# Altium PCB PCB2.PcbDoc
Units mil, origin at the board's own origin, x right, y up, seen from the top; angles counter-clockwise.
Board outline 1896.5 x 1505 mil, 4 copper layers (Top Layer, GND_Layer, PWR_Layer, Bottom Layer), stack 61.2 mil thick; 58 components, 40 nets, 238 pads, 93 vias.
Unrouted connection lines stored in the file: 76.
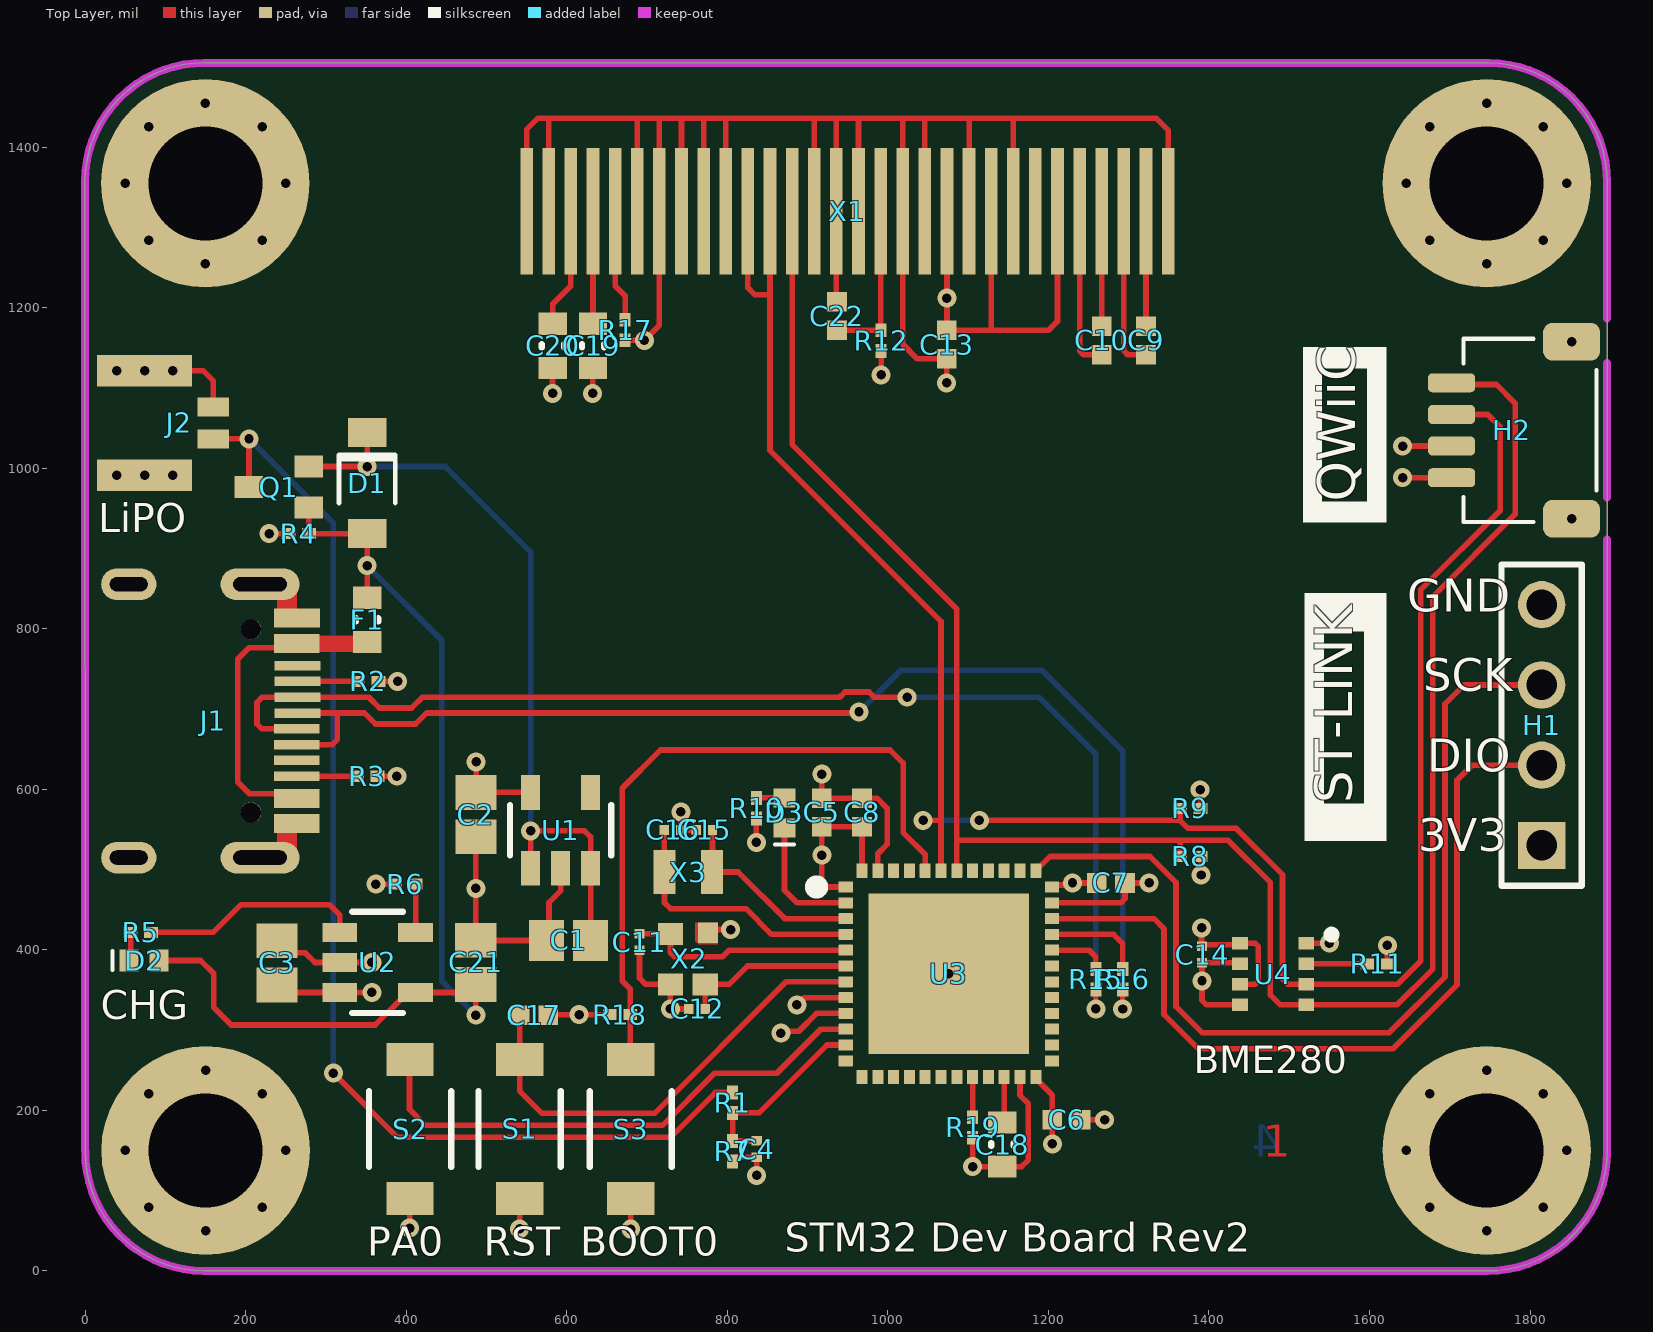
[diagram p0: Top Layer view]
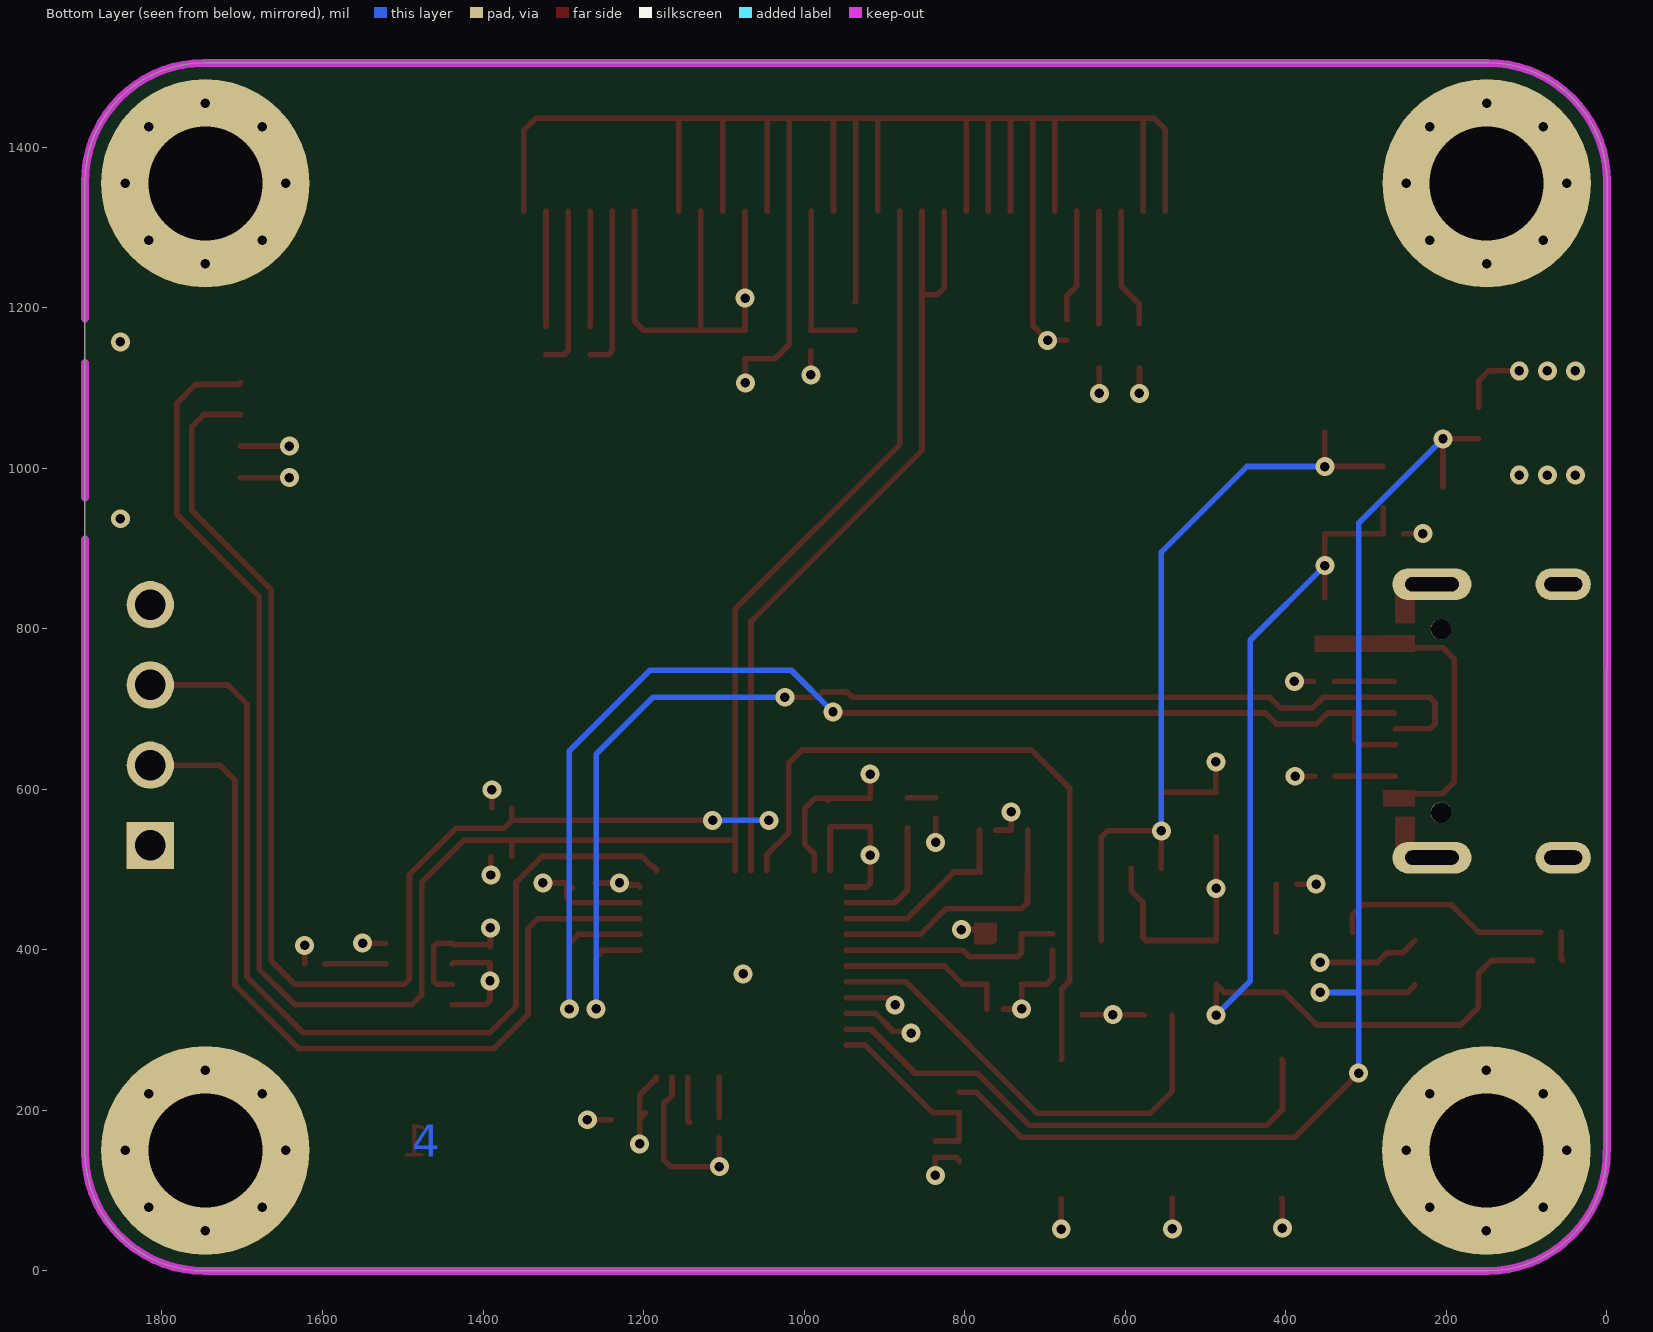
[diagram p1: Bottom Layer view, seen from below]
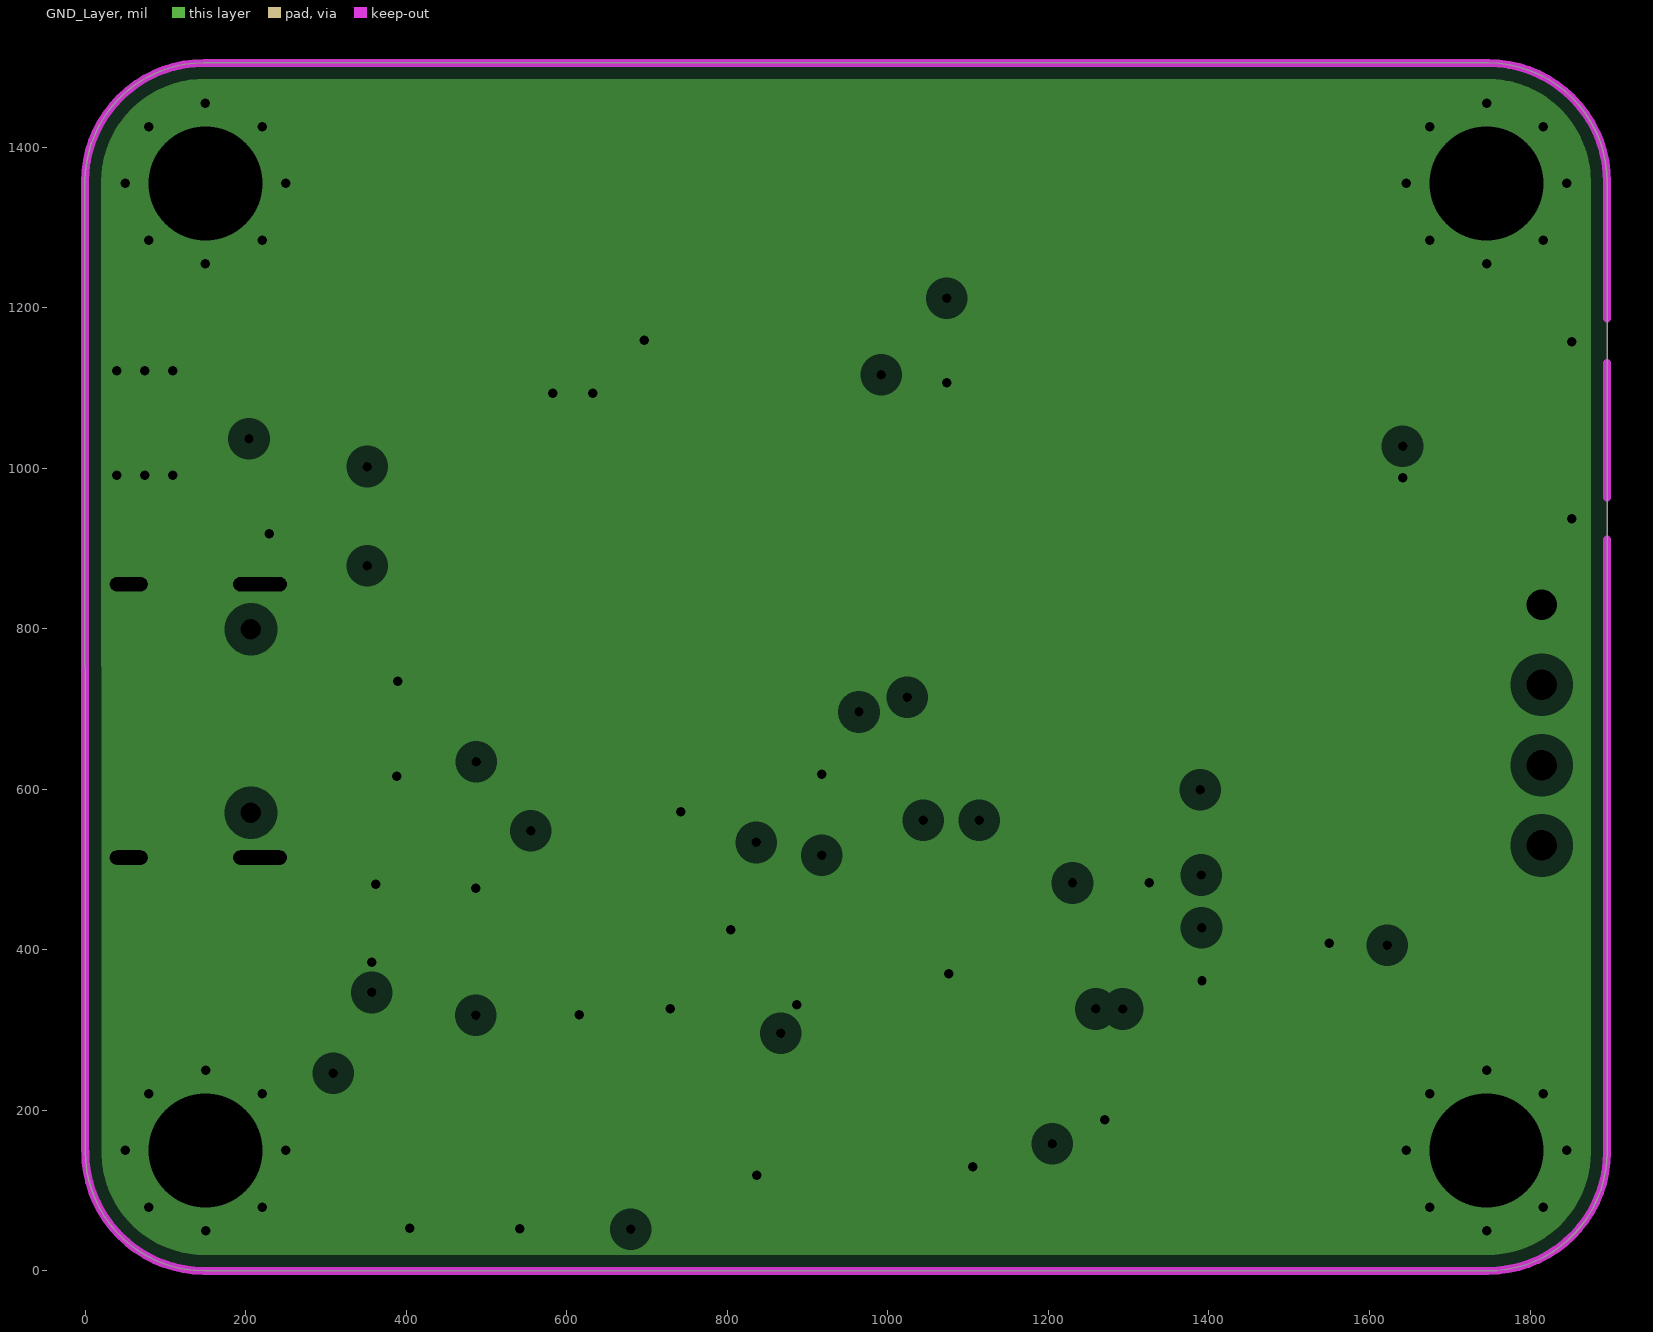
[diagram p2: GND_Layer, clearances drawn from the general rule]
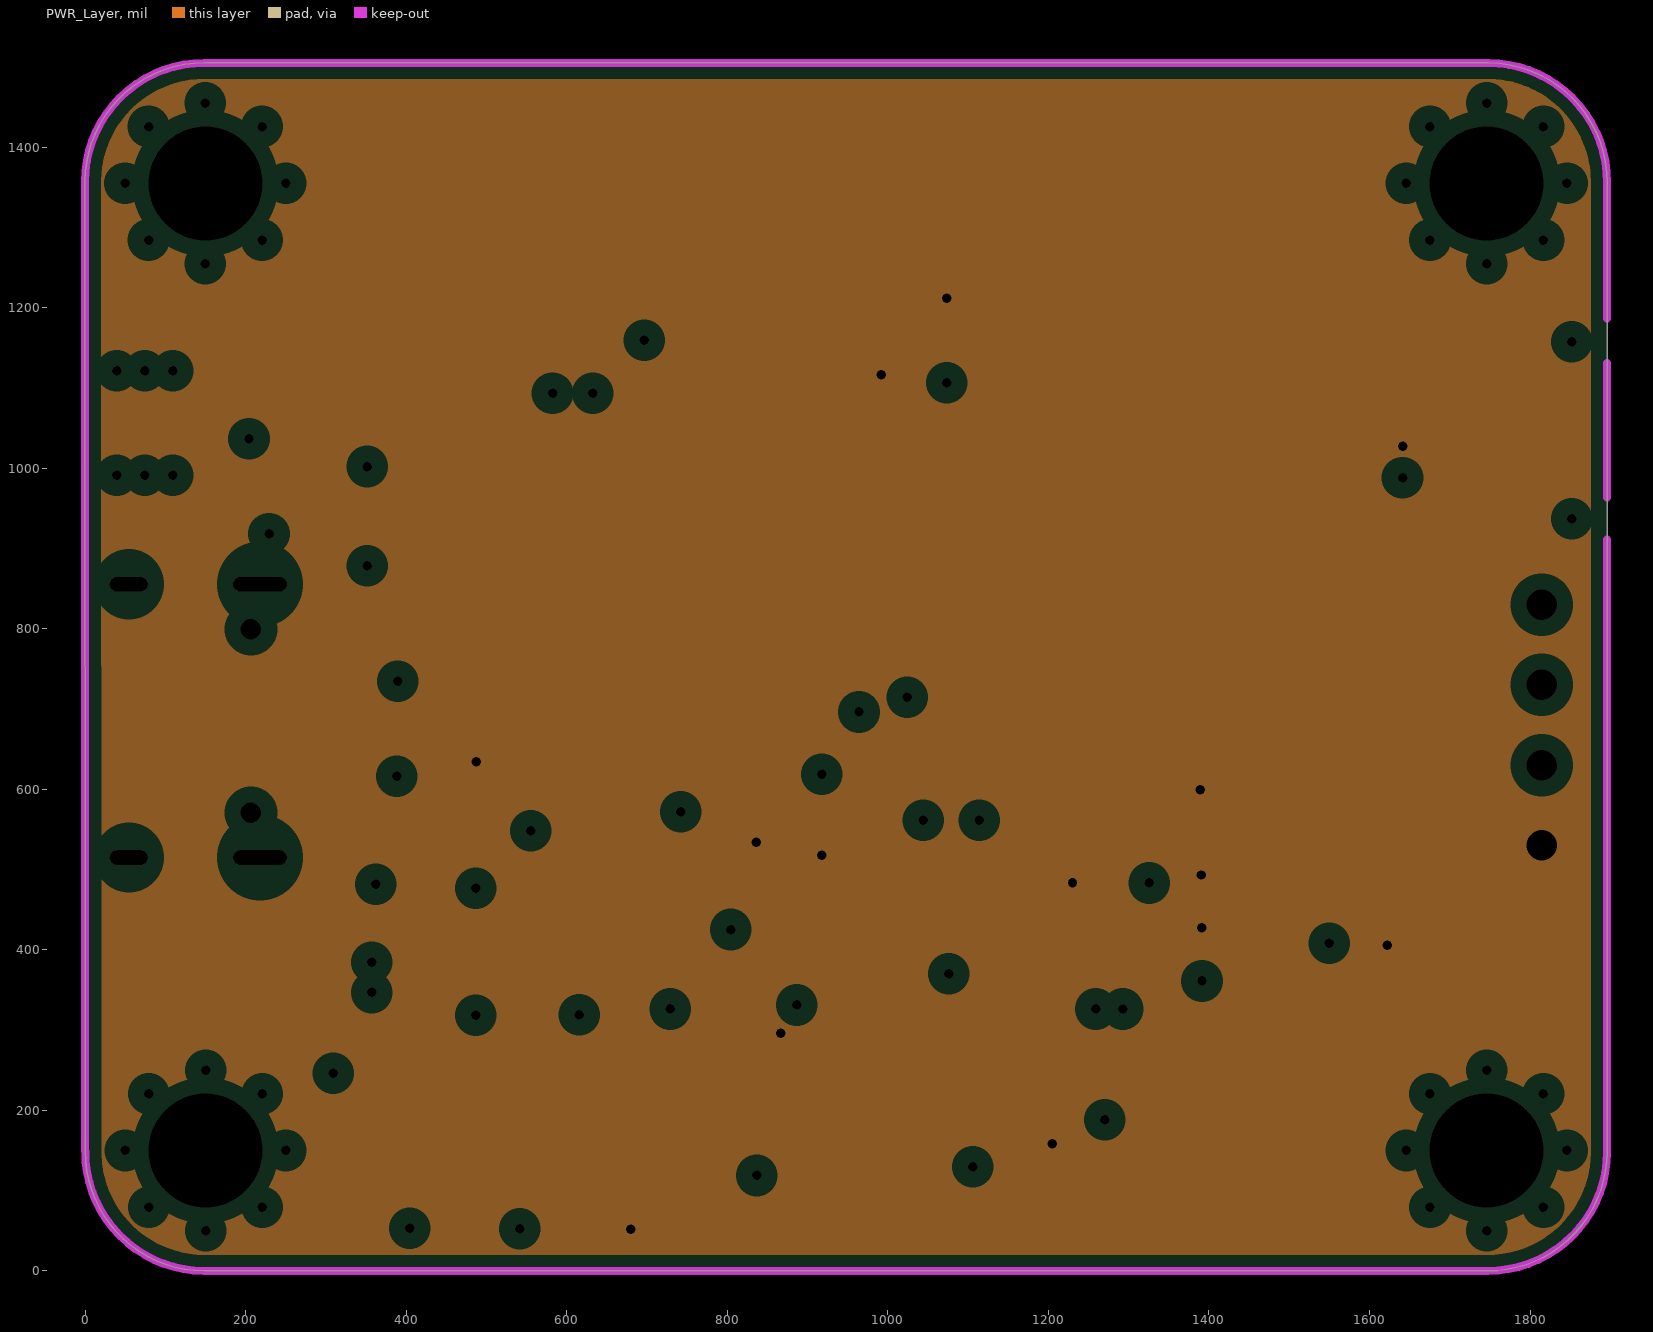
[diagram p3: PWR_Layer, clearances drawn from the general rule]
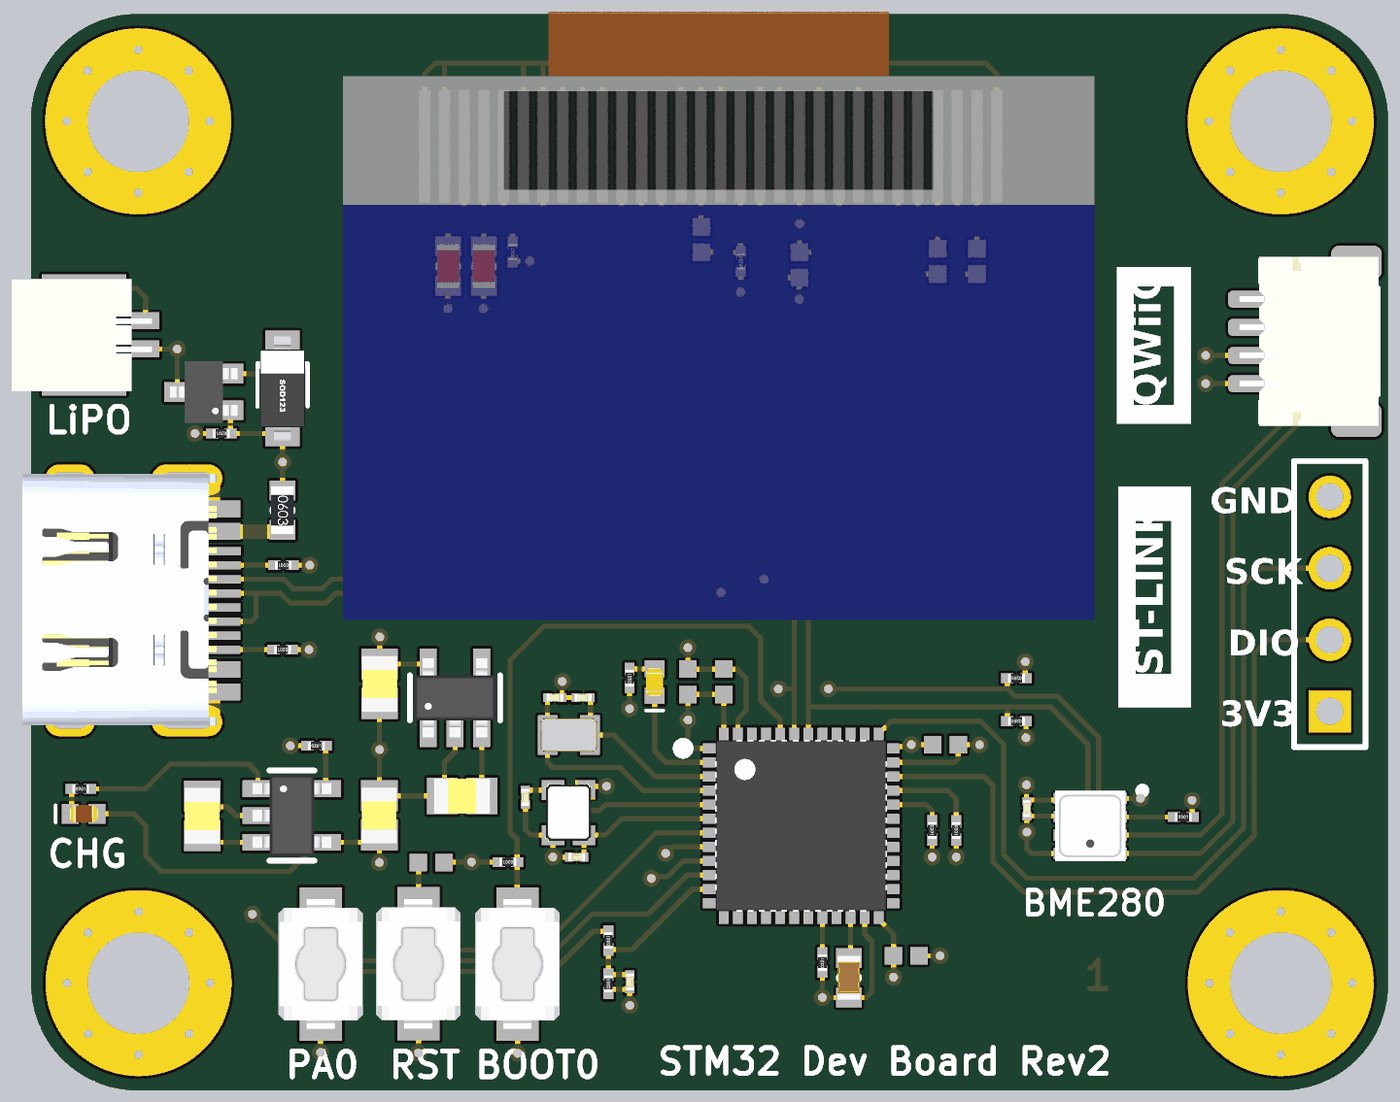
[diagram p4: 3D render of the assembled board from above, using the file's embedded part models]

## Layer stack, top to bottom
Top Solder: solder mask 0.4, Solder Resist, Dk 3.5
Top Layer: signal copper 1.4
Dielectric 2: prepreg 2.8, PP-006, Dk 4.1
GND_Layer: plane copper 1.2, net GND
Dielectric 1: dielectric 50.4, FR-4, Dk 4.8
PWR_Layer: plane copper 1.2, net +3.3V
Dielectric 3: prepreg 2.8, PP-006, Dk 4.1
Bottom Layer: signal copper 1.4
Bottom Solder: solder mask 0.4, Solder Resist, Dk 3.5

## Board outline
0,149 ccw(c148.5,148.5) 148,0 1747,0 ccw(c1747.5,148.5) 1896,148 1895.96,147.5 1895.96,1356 1896,1356 ccw(c1747.5,1356.5) 1748,1505 149,1505 148.5,1505 ccw(c148,1356.5) -0.5,1357

## Design rules (kind name [scope] priority, off if disabled: settings)
Clearance Clearance_J1 [All vs InComponent('J1')] p1: gap=5 ignorepadtopadclearanceinfootprint=FALSE
Clearance Clearance_U3 [All vs InComponent('U3')] p2: gap=5 ignorepadtopadclearanceinfootprint=FALSE
Clearance [All] p3: gap=8 ignorepadtopadclearanceinfootprint=FALSE
HoleSize [All] p1: absolutevalues=TRUE maxlimit=300 minlimit=1 maxpercent=80.000 minpercent=20.000
MinimumSolderMaskSliver [All] p1: minsoldermaskwidth=0.1
PlaneClearance [All] p1: clearance=20
PlaneConnect PlaneConnect_VIA [(IsVia)] p1: planeconnectstyle=Direct reliefexpansion=20 reliefentries=4 reliefconductorwidth=10 reliefairgap=10
PlaneConnect [All] p2: planeconnectstyle=Relief reliefexpansion=20 reliefentries=4 reliefconductorwidth=10 reliefairgap=10
PolygonConnect [All] p1: connectstyle=Relief reliefconductorwidth=10 reliefentries=4 polygonreliefangle="90 Angle" airgapwidth=10
RoutingVias [All] p1: holewidth=11.81 width=23.62 viastyle="Through Hole" minholewidth=11.81 minwidth=23.62 maxholewidth=11.81 maxwidth=23.62
SilkToSilkClearance [All] p1: silktosilkclearance=2
SilkToSolderMaskClearance [IsPad] p1: minsilkscreentomaskgap=1 clearancetoexposedcopper=TRUE
SolderMaskExpansion [All] p1: expansion=4 istentingtop=FALSE
Width [All] p1: maxlimit=25 minlimit=7 preferedwidth=7
24 further rules are at their usual default settings.

## Components (designator, comment, footprint, x,y, rotation, side; value= is the part's Value field where it differs from the comment)
C1 "10uF" CAPC2012X140N 602.03,411.66 r180 top
C2 "10uF" CAPC2012X140N 486.69,568.42 r270 top
C3 "10uF" CAPC2012X140N 238.96,383.87 r90 top
C4 "0.1uF" CAPC0603X56N 836.52,151.62 r270 top
C5 "0.1uF" CAPC1005X56N 917.69,571.26 r270 top
C6 "0.1uF" CAPC1005X56N 1222.65,188.27 r180 top
C7 "0.1uF" CAPC1005X56N 1277.65,483.27 r180 top
C8 "0.1uF" CAPC1005X56N 967.69,571.26 r270 top
C9 "1uF" CAPC1005X56N 1321.52,1159.14 r90 top
C10 "1uF" CAPC1005X56N 1266.52,1159.14 r90 top
C11 "10pF" CAPC0603X56N 690.42,409.69 r270 top
C12 "10pF" CAPC0603X56N 762.28,326.27 r180 top
C13 "1uF" CAPC1005X56N 1073.52,1154.14 r90 top
C14 "0.1uF" CAPC0603X56N 1391.29,393.93 r270 top
C15 "10pF" CAPC0603X56N 771.19,549.31 r180 top
C16 "10pF" CAPC0603X56N 731.72,549.31 r0 top
C17 "1uF" CAPC1005X56N 558.83,318.54 r180 top
C18 "2.2uF" CAPC1608X09L 1142.57,157.44 r270 top
C19 "4.7uF" CAPC1608X09L 632.57,1152.44 r90 top
C20 "2.2uF" CAPC1608X09L 582.57,1152.44 r270 top
C21 "10uF" CAPC2012X140N 486.52,384.42 r90 top
C22 "0.1uF" CAPC1005X56N 936.52,1189.57 r90 top
D1 "MBR0520-TP" SOD123 351.11,981.54 r270 top value=MBR0520
D2 "Red Led" LED1005X40N-Red 73.33,386.66 r0 top
D3 "=Value" LED1005X40N-Orange 871.11,570.63 r90 top
F1 "PTC" "RESC1608X06L (0603 FOOTPRINT)" 351.11,811.1 r270 top
H1 "CON4" HDR1X4-Empty 1814.5,680 r90 top locked
H2 "QWiiC" SM04B-SRSS-TB 1776.96,1047.31 r90 top
J1 "USB-C" TYPE-C-31-M-12 62.06,514.88 r270 top locked
J2 "CON2" JST_Micro_2PIN 159.59,1056.35 r270 top
Q1 "LP1480WT1G" SC-70 241.11,976.54 r180 top
R1 "1M" "RESC0603X40L (0201 footprint)" 806.52,209.65 r90 top
R2 "5.1K" "RESC0603X40L (0201 footprint)" 352.3,734.37 r180 top
R3 "5.1K" "RESC0603X40L (0201 footprint)" 351.31,616.26 r180 top
R4 "100K" "RESC0603X40L (0201 footprint)" 265.72,918.54 r180 top
R5 "4.7K" "RESC0603X40L (0201 footprint)" 69.23,421.66 r0 top
R6 "4K" "RESC0603X40L (0201 footprint)" 398.72,481.86 r0 top
R7 "1M" "RESC0603X40L (0201 footprint)" 806.52,149.06 r90 top
R8 "4.7K" "RESC0603X40L (0201 footprint)" 1376.75,516.31 r180 top
R9 "4.7K" "RESC0603X40L (0201 footprint)" 1376.75,576.31 r180 top
R10 "4.7K" "RESC0603X40L (0201 footprint)" 836.11,576.54 r90 top
R11 "10K" "RESC0603X40L (0201 footprint)" 1609.91,382.34 r0 top
R12 "10K" "RESC0603X40L (0201 footprint)" 991.52,1159.06 r90 top
R15 "10" "RESC0603X40L (0201 footprint)" 1258.96,363.51 r270 top
R16 "10" "RESC0603X40L (0201 footprint)" 1292.52,363.47 r270 top
R17 "390K" "RESC0603X40L (0201 footprint)" 672.57,1172.2 r90 top
R18 "10K" "RESC0603X40L (0201 footprint)" 666.16,319.31 r180 top
R19 "10K" "RESC0603X40L (0201 footprint)" 1105.48,178.66 r90 top
S1 "=Value" TS-1088R-02526 541.11,176.93 r270 top
S2 "=Value" TS-1088R-02526 404.59,176.66 r270 top
S3 "=Value" TS-1088R-02526 679.59,176.66 r90 top
U1 "HT7833" SOT95P280X144-5N 592.19,548.91 r90 top
U2 "MCP73831T-2ACI/OT" SOT95P280X144-5N 364.27,384.26 r0 top value=MCP73831T-2ACI
U3 "STM32F401CCU6" "QFN48_NEWEST 0.5mm pitch" 1075.96,370 r0 top
U4 "BME280" LGA2.5X2.5-8N 1479.78,369.72 r0 top
X1 "OLED_0.96 inch" "OLED_GLASS 0.96 INCH_TOPSIDE" 949.5,1320 r0 top locked
X2 "25 Mhz" OSC20X16 752.39,389.11 r270 top
X3 "32Khz" TJXM32768K2TGDCNT2T 751.11,496.93 r180 top

## Footprints (in the part's own frame and the unit in brackets; to place one, negate y for a bottom-side part, rotate by r counter-clockwise, add the part's x,y. Pads: shape width x height; smd on the part's side, far side on the other; paste and mask are expansions set on the pad)
CAPC0603X56N [mm] "Chip Capacitor, 2-Leads, Body 0.61x0.3mm, IPC Medium Density (0201 ceramic)"
  rect 0.3x0.32 smd: 1(-0.26,0) 2(0.26,0)
  body extent -0.3,-0.15 0.3,0.15, height 0.3
CAPC1005X56N [mm] "Chip Capacitor, 2-Leads, Body 1.0x0.5mm, IPC Medium Density (0402 ceramic)"
  rect 0.62x0.62 smd: 1(-0.45,0) 2(0.45,0)
  body extent -0.55,-0.3 0.55,0.3, height 0.6
CAPC1608X09L [mm] "Chip Capacitor, 2-Leads, Body 1.6x0.8mm, IPC High Density (0603 dense)"
  rect 0.7x0.9 smd: 1(-0.7,0) 2(0.7,0)
  silkscreen extent -0.05,-0.35 0.05,0.35, body extent -0.89,-0.48 0.88,0.48, height 1.03
CAPC2012X140N [mm] "Chip Capacitor, 2-Leads, Body 2.0x1.3mm, IPC Medium Density (0805 ceramic)"
  rect 1.1x1.3 smd: 1(-0.7,0) 2(0.7,0)
  body extent -1,-0.62 1,0.63, height 1.24
HDR1X4-Empty [mm]
  rect 1.5x1.5 hole 0.965: 1(-3.81,0)
  round 1.5 hole 0.965: 2(-1.27,0) 3(1.27,0) 4(3.81,0)
  silkscreen extent -5.08,-1.27 5.08,1.27
JST_Micro_2PIN [mm]
  rect 0.6x1 smd: 1(0.5,0) 2(-0.5,0)
  rect 1x3 smd: ""(-1.65,-2.175) ""(1.65,-2.175)
  body extent -1.99,-4.74 2,0.24, height 2.9
LED1005X40N-Orange [mm] "Chip LED 2-Leads, Body 1.0x0.5mm, (0402)"
  rect 0.6x0.7 smd: 1(-0.475,0) 2(0.475,0)
  silkscreen extent -1,-0.3 -1,0.3, body extent -0.5,-0.3 0.5,0.3, height 0.2
LED1005X40N-Red [mm] "Chip LED 2-Leads, Body 1.0x0.5mm, (0402)"
  rect 0.6x0.7 smd: 1(-0.475,0) 2(0.475,0)
  silkscreen extent -1,-0.3 -1,0.3, body extent -0.5,-0.3 0.5,0.3, height 0.2
LGA2.5X2.5-8N [mm] "LGA 2.5X2.5"
  rect 0.5x0.4 smd mask+0.076: 1(1.05,0.975) 2(1.05,0.325) 5(-1.05,-0.975) 6(-1.05,-0.325) 7(-1.05,0.325) 8(-1.05,0.975)
  rect 0.5x0.4 smd paste+0 mask+0.076: 3(1.05,-0.325) 4(1.05,-0.975)
  silkscreen extent 1.73,1.13 1.98,1.37, body extent -1.25,-1.25 1.25,1.25, height 0.93
"OLED_GLASS 0.96 INCH_TOPSIDE" [mm] "OLED_GLASS 0.96 INCH"
  rect 0.4x4 smd: 1(10.15,0) 2(9.45,0) 3(8.75,0) 4(8.05,0) 5(7.35,0) 6(6.65,0) 7(5.95,0) 8(5.25,0) 9(4.55,0) 10(3.85,0) 11(3.15,0) 12(2.45,0) 13(1.75,0) 14(1.05,0) 15(0.35,0) 16(-0.35,0) 17(-1.05,0) 18(-1.75,0) 19(-2.45,0) 20(-3.15,0) 21(-3.85,0) 22(-4.55,0) 23(-5.25,0) 24(-5.95,0) 25(-6.65,0) 26(-7.35,0) 27(-8.05,0) 28(-8.75,0) 29(-9.45,0) 30(-10.15,0)
  body extent -13.06,-16.81 13.61,4.78, height 2.31
OSC20X16 [mm] "Crystal 2.0mm x 1.60mm 0.5mm height"
  rect 0.7x0.8 smd: 1(-0.783,-0.591) 2(0.817,-0.591) 3(0.817,0.509)
  rect 0.635x0.635 smd: 4(-0.817,0.591)
  Top Layer region: -1.138,0.196 -0.554,0.196 -0.453,0.298 -0.453,0.907 -1.138,0.907
  body extent -1.01,-0.87 1.04,0.78, height 0.4
"QFN48_NEWEST 0.5mm pitch" [mm] "QFN, 48-Leads, Body 7x7mm, Pitch 0.5mm, IPC Medium Density"
  rrect9% 0.45x0.35 smd: 1(-3.265,2.75) 2(-3.265,2.25) 3(-3.265,1.75) 4(-3.265,1.25) 5(-3.265,0.75) 6(-3.265,0.25) 7(-3.265,-0.25) 8(-3.265,-0.75) 9(-3.265,-1.25) 10(-3.265,-1.75) 11(-3.265,-2.25) 12(-3.265,-2.75) 25(3.265,-2.75) 26(3.265,-2.25) 27(3.265,-1.75) 28(3.265,-1.25) 29(3.265,-0.75) 30(3.265,-0.25) 31(3.265,0.25) 32(3.265,0.75) 33(3.265,1.25) 34(3.265,1.75) 35(3.265,2.25) 36(3.265,2.75)
  rrect9% 0.35x0.45 smd: 13(-2.75,-3.265) 14(-2.25,-3.265) 15(-1.75,-3.265) 16(-1.25,-3.265) 17(-0.75,-3.265) 18(-0.25,-3.265) 19(0.25,-3.265) 20(0.75,-3.265) 21(1.25,-3.265) 22(1.75,-3.265) 23(2.25,-3.265) 24(2.75,-3.265) 37(2.75,3.265) 38(2.25,3.265) 39(1.75,3.265) 40(1.25,3.265) 41(0.75,3.265) 42(0.25,3.265) 43(-0.25,3.265) 44(-0.75,3.265) 45(-1.25,3.265) 46(-1.75,3.265) 47(-2.25,3.265) 48(-2.75,3.265)
  rect 5.08x5.08 smd paste-4: 49(0,0)
  silkscreen extent -4.37,2.57 -4.01,2.93, body extent -3.05,-3.05 3.05,3.05, height 0.9
"RESC0603X40L (0201 footprint)" [mm] "Chip Resistor, 2-Leads, Body 0.6x0.3mm, IPC Medium Density (0201)"
  rect 0.44x0.35 smd: 1(-0.325,0) 2(0.325,0)
  body extent -0.3,-0.15 0.3,0.15, height 0.21
"RESC1608X06L (0603 FOOTPRINT)" [mm] "Chip Resistor, 2-Leads, Body 1.6x0.8mm, IPC High Density (0603 dense)"
  rect 0.7x0.9 smd: 1(-0.7,0) 2(0.7,0)
  silkscreen extent -0.05,-0.35 0.05,0.35, body extent -0.85,-0.4 0.85,0.4, height 0.56
SC-70 [mm] "SOT23, 3-Leads, Body 2x1.25mm, Pitch 0.65mm"
  rect 0.9x0.7 smd: 1(-0.95,0.65) 2(-0.95,-0.65) 3(0.95,0)
  body extent -1.2,-1.1 1.2,1.1, height 1
SM04B-SRSS-TB [mm] "CONN HEADER 4POS .100 R/A QWIIC"
  rrect50% 0.6x1.5 smd: 1(1.5,1.9) 2(0.5,1.9) 3(-0.5,1.9) 4(-1.5,1.9)
  rrect50% 1.2x1.8 smd: 5(-2.8,-1.9) 5(2.8,-1.9)
  silkscreen extent -2.9,-2.69 2.9,1.52, body extent -3,-2.69 3,2.26, height 3.25
SOD123 [mil] "Molded Diode, 2-Leads, Body 2.85x1.8mm, IPC Medium Density (SOD123)"
  rect 36x48 smd: 1(-63,0) 2(63,0)
  silkscreen extent -35,-35 25,35, body extent -73,-31 73,31, height 50
SOT95P280X144-5N [mm] "SOT23, 5-Leads, Body 3.1x3.0mm (max), Pitch 0.95mm, IPC Medium Density (RFMD SOT23-5)"
  rect 1.1x0.6 smd: 1(-1.2,0.95) 2(-1.2,0) 3(-1.2,-0.95) 4(1.2,-0.95) 5(1.2,0.95)
  silkscreen extent -0.8,-1.6 0.8,1.6, body extent -1.4,-1.45 1.4,1.45, height 1.45
TJXM32768K2TGDCNT2T [mm] "SMT Crystal, 2-Leads, Body 2x1.2mm, IPC Medium Density"
  rect 0.7x1.4 smd: 1(-0.75,0) 2(0.75,0)
  body extent -1,-0.6 1,0.6, height 0.6
TS-1088R-02526 [mm] "SWITCH TACTILE SPST-NO 0.05A 12V"
  rect 1.05x1.5 smd: 1(-2.2,0) 2(2.2,0)
  silkscreen extent -1.2,-1.3 1.2,1.3, body extent -2.3,-1.5 2.3,1.5, height 2
TYPE-C-31-M-12 [mm] "USB-C Connector"
  oval 1x2.5 hole 0.45 slot 1.7 at 90 deg: 1(-8.65,3.955) 1(0,3.955)
  oval 1x1.75 hole 0.45 slot 1.2 at 90 deg: 1(-8.65,-0.2) 1(0,-0.2)
  rect 0.3x1.45 smd: A1(-7.726,5.119) A4(-6.926,5.117) A5(-5.575,5.142) A6(-4.575,5.142) A7(-4.075,5.117) A8(-3.075,5.117) A9(-1.727,5.117) A12(-0.924,5.117) B1(-1.224,5.117) B4(-2.021,5.117) B5(-2.575,5.117) B6(-3.575,5.117) B7(-5.075,5.142) B8(-6.075,5.142) B9(-6.626,5.117) B12(-7.426,5.119)
  round 0.65 hole 0.65 unplated: ""(-7.225,3.667) ""(-1.425,3.667)
  body extent -8.82,-1.89 0.12,5.01, height 3.31

## Part data
C1 C2 C3 C21: library part CAP_0805, "CAP 10uF 0805", Part_Footprint=0805
C4 C11 C14 C15: library part CAP_0201, "CAP 0.1uF 0201", Part_Footprint=0201
C5 C6 C7 C8 C22: library part CAP_0402, "CAP 0.1uF 0402", Part_Footprint=0402
C9 C10 C13 C17: library part CAP_0402, "CAP 1uF 0402", Part_Footprint=0402
C12 C16: library part CAP_0201, "CAP 10pF 0201", Part_Footprint=0201
C18 C20: library part CAP_0603, "CAP 2.2uF 0603", Part_Footprint=0603
C19: library part CAP_0603, "CAP 4.7uF 0603", Part_Footprint=0603
D1: "DIODE SCHOTTKY 20V 500MA SOD-123", Manufacturer=Micro, Part_Footprint=SOD-123, Part_Number=C78746, Vendor=LCSC
D2: library part LED_0402_SMALL_Red, "LED Red 0402", Manufacturer=Lite-On, Part_Footprint=0402, Part_Number=C364556, Vendor=LCSC
D3: library part LED_0402_SMALL_Orange, "LED Orange 0402", Manufacturer=Lite-On, Part_Footprint=0402, Part_Number=C364554, Vendor=LCSC
F1: library part PTC_FUSE_0603, "PTC FUSE 0.5mA hold, 1A trip 0603", Manufacturer="JDT Fuse", Part_Number=C2982257, Vendor=LCSC
H1: "CONN HEADER 4POS .100\" PADS", Part_Number=PADS
H2: library part SM04B-SRSS-TB, "CONN HEADER 4POS .100 R/A QWIIC", Manufacturer=JST, Part_Number=PRT-14417, Vendor=Digi-Key
J1: "CONN RECPT USB-C", Manufacturer=KHE, Part_Footprint=SMT, Part_Number=C165948, Vendor=LCSC
J2: library part JST_Micro_CONN_2PIN, "JST MIcro CONN 2POS"
Q1: "MOSFET P-CH 20V 1.4A SC-70", Manufacturer=LRC, Part_Footprint=SC-70, Part_Number=C172434, Vendor=LCSC
R1 R7: library part RES_0201, "RES 1M 0201", PartFootprint=0201
R2 R3: library part RES_0201, "RES 0201 5.1K", PartFootprint=0201
R4: library part RES_0201, "RES 100K 0201", PartFootprint=0201
R5 R8 R9 R10: library part RES_0201, "RES 4.7K 0201", PartFootprint=0201
R6: library part RES_0201, "RES 4K 0201", PartFootprint=0201
R11 R12 R18 R19: library part RES_0201, "RES 10K 0201", PartFootprint=0201
R15 R16: library part RES_0201, "RES 10 0201", PartFootprint=0201
R17: library part RES_0201, "RES 390K 0201", PartFootprint=0201
S1 S2 S3: library part TS-1088R-02526, "Tactile Micro Switch", Manufacturer=XUNPU, Part_Footprint=SMD, Part_Number=C455281, Vendor=LCSC
U1: "IC LDO 3.3V 0.5A SOT23-5", Manufacturer=Holtek, Part_Footprint=SOT23-5, Part_Number=C164106, Vendor=LCSC
U2: "Charger IC Lithium-Ion/Polymer SOT23-5", Manufacturer=Microchip, Part_Number=MCP73831T-2ACI/OT, Vendor=Digi-Key
U3: "IC MCU 32BIT 256KB FLASH 48LQFN", Manufacturer="ST Micro", Part_Footprint=48LQFN, Part_Number=STM32F401CCU6
U4: "Gas, Humidity, Pressure, Temperature Sensor I2C,", Manufacturer=Bosch, Part_Footprint=8LGA, Part_Number=BME280, Vendor=Digi-Key
X1: library part "OLED_GLASS 0.96 inch", "0.96 inch OLED_GLASS", Manufacturer=Buy-Display, Part_Number=ER-OLED0.96-3W, Vendor=Buy-Display
X2: library part 25Mhz, "CRYSTAL 25MHZ 10PF SMD", Manufacturer=ECS, Part_Number=ECS-250-10-37B2-CTN-TR, Vendor=Digi-Key
X3: library part TJXM32768K2TGDCNT2T, "CRYSTAL 32.768 KHZ 12.5PF SMD", Manufacturer=TAE, Part_Number=TJXM32768K2TGDCNT2T, Vendor=LCSC

## Free pads (board coordinates)
  round 260 hole 142: ""(149.5,1355) ""(150,150) ""(1746,1355) ""(1746,150)

## Via types
v1: diameter 23.62, hole 11.81, Top Layer to Bottom Layer, tented both sides, 93 vias

## Nets (pads, with @x,y where several pads share a name; then routed paths per layer and width w, separated by ;. In a path a pad name is that pad's centre, name@x,y a point inside that pad or via, vN(x,y) a via of type N, cw(c..) or ccw(c..) an arc to the next point about the centre after c; other vN are vias at no path point)
+3.3V: C2.1 C5.2 C6.2 C7.2 C8.2 C13.2 C14.1 H1.1 H2.3 R8.1 R9.1 R10.1 R11.2 R12.1 S3.1 U1.5 U3.1 U3.9 U3.24 U3.36 U3.48 U4.6 U4.8 X1.6 X1.9 X1.11 | length 1532.3
  Top Layer w7: C2.1 C2.1@486.86,596.15 ; v1(486.86,634.2) C2.1@486.86,596.15 ; U1.5 C2.1@486.86,596.15 ; v1(679.59,52) S3.1 ; v1(836.11,533.74) R10.1 ; v1(866.52,296.27) 868.83,298.58 888.83,298.58 911.04,320.79 U3.9 ; U3.1 922,478.27 917.69,482.57 C5.2 C8.2 U3.48 ; v1(991.52,1116.27) R12.1 ; X1.11 C13.2 1128.63,1171.86 ; X1.9 1128.63,1171.86 ; U3.24@1184.22,238.26 1185.45,238.26 1204.93,218.78 C6.2 ; U3.24@1184.22,238.3 U3.24 ; C6.2@1197.5,197.03 1197.5,196.97 C6.2 ; U3.36 1207,480.77 1227.43,480.77 v1(1229.93,483.27) C7.2 ; v1(1204.93,158.27) C6.2 ; X1.6 1211.31,1183.15 1200.02,1171.86 1128.63,1171.86 ; R9.1@1388.96,576.89 v1(1388.96,599.41) ; v1(1390.13,493.2) R8.1@1390.13,515.72 ; C14.1@1390.7,404.75 v1(1390.7,427.27) ; C14.1 1393.26,406.14 1436.46,406.14 U4.8 1457.42,408.11 1461.52,404.01 1461.52,361.03 1457.42,356.93 U4.6 ; R11.2@1622.12,382.92 v1(1622.12,405.44) ; v1(1641.1,1027.62) H2.3
  other v1: 917.69,518.06 1073.52,1211.86
BOOT0: R18.1 S3.2 U3.44 | length 864.5
  Top Layer w7: S3.2 678.96,263.91 R18.1 678.96,351.31 668.96,361.31 668.96,601.31 716.63,648.98 1002.69,648.98 1018.96,632.71 1018.96,546.31 1046.43,518.83 U3.44
D+: J1.A6 J1.B6 R16.2 | length 1535.2
  Top Layer w7: J1.B6 307.68,655.63 314.06,662.01 314.06,695 ; J1.A6 314.06,695 ; v1(963.96,696.31) 962.65,695 425.25,695 411.52,681.27 361.52,681.27 347.78,695 314.06,695 ; v1(1292.52,326.27) R16.2
  Bottom Layer w7: v1(963.96,696.31) 1015.92,748.27 1192,748.27 1292.52,647.75 v1(1292.52,326.27)
D-: J1.A7 J1.B7 R15.2 | length 1514.5
  Top Layer w7: J1.A7 219.95,675.31 213.96,681.31 213.96,708.31 220.33,714.68 J1.B7 353.1,714.68 366.52,701.27 406.52,701.27 419.93,714.68 939.93,714.68 946.52,721.27 976.52,721.27 983.1,714.68 v1(1023.96,714.68) ; v1(1258.96,326.31) R15.2
  Bottom Layer w7: v1(1023.96,714.68) 1188.1,714.68 1258.96,643.83 v1(1258.96,326.31)
GND: C1.2 C2.2 C3.2 C4.2 C5.1 C6.1 C7.1 C8.1 C11.2 C12.2 C13.1 C14.2 C15.2 C16.2 C17.1 C18.2 C19.1 C20.2 C21.2 C22.2 H1.4 H2.4 H2.5 J1.1 J1.A1 J1.A12 J1.B1 J1.B12 J2. J2.2 pad. R2.1 R3.1 R4.2 R6.1 R7.1 R17.1 R18.2 R19.1 S1.2 S2.2 U1.2 U2.2 U3.8 U3.23 U3.35 U3.47 U3.49 U4.1 U4.5 U4.7 X1.1 X1.8 X1.10 X1.12 X1.13 X1.15 X1.16 X1.17 X1.21 X1.22 X1.23 X1.24 X1.25 X1.29 X1.30 X2.2 X2.4 | length 5089.1
  Top Layer w7: v1(108.96,1121.31) 147.06,1121.31 159.59,1108.78 J2.2 ; v1(228.93,918.54) R4.2 ; C3.2 254.12,396.26 274.11,396.26 286.11,384.26 v1(357.11,384.26) ; v1(361.93,481.86) R6.1 ; R3.1 v1(388.11,616.26) ; R2.1 v1(389.09,734.37) ; v1(404.11,53.26) 404.11,89.57 S2.2 ; C2.2 486.69,412.15 C21.2 486.83,411.66 C1.2 577.69,414.88 577.69,458.98 592.19,473.47 U1.2 ; v1(541.11,52.26) S1.2@541.11,90.31 ; X1.30 549.89,1422.05 564.11,1436.26 1156.19,1436.26 ; C17.1 577.31,319.31 R18.2 ; X1.29 577.45,1436.26 ; v1(582.11,1093.26) 582.11,1124.42 C20.2 ; v1(632.11,1093.26) 632.11,1124.42 C19.1 ; R17.1 v1(696.57,1159.41) 715.25,1178.09 X1.24 715.25,1436.26 ; X1.25 687.69,1436.26 ; C11.2 690.42,364.84 698.33,356.93 X2.2 728.96,356.77 v1(728.96,326.31) C12.2 ; v1(741.96,571.83) C16.2 C15.2 ; X1.23 742.81,1436.26 ; X1.22 770.37,1436.26 ; X2.4@775.52,425.27 v1(803.93,425.27) ; X1.21 797.93,1436.26 ; R7.1 806.52,138 809.91,141.39 C4.2 v1(836.52,118.87) ; v1(886.52,331.27) 895.72,340.47 U3.8 ; X1.17 908.16,1436.26 ; v1(917.69,618.98) C5.1 C8.1 ; 935.72,1436.26 X1.16 935.72,1208.09 C22.2 ; X1.15 963.28,1436.26 ; C8.1@970.36,586.31 C8.1 ; U3.47 987.37,519.72 998.96,531.31 998.96,576.31 986.29,588.98 C8.1 ; 1018.4,1436.26 X1.13 1018.4,1154.39 1036.36,1136.43 C13.1 1073.11,1136.02 v1(1073.11,1106.26) ; X1.12 1045.96,1436.26 ; X1.10 1101.07,1436.26 ; R19.1 v1(1105.48,129.88) C18.2 1166.55,129.88 1174.93,138.27 1174.93,208.27 1164.54,218.66 U3.23 ; X1.8 1156.19,1436.26 ; U3.35 1290.25,458.58 1295.37,463.7 C7.1 ; C6.1 v1(1269.93,188.27) ; C7.1@1288.83,476.73 C7.1 ; v1(1325.37,483.27) C7.1 ; X1.1 1349.11,1421.26 1334.11,1436.26 1156.19,1436.26 ; U4.5 1397.04,331.34 1391.29,337.09 C14.2 1437.26,383.69 U4.7 ; U4.1 1521.19,408.19 1549.85,408.19 v1(1549.93,408.27) ; v1(1641.1,988.25) H2.4
  other v1: 150,50 1746,50 79.29,79.29 220.71,79.29 1675.29,79.29 1816.71,79.29 50,150 250,150 1646,150 1846,150 79.29,220.71 220.71,220.71 1675.29,220.71 1816.71,220.71 150,250 1746,250 615.34,319.31 1391.29,361.17 1075.96,370 486.69,476.5 1851.76,937.07 38.96,991.39 73.96,991.39 108.96,991.39 38.96,1121.31 73.96,1121.31 1851.76,1157.54 149.5,1255 1746,1255 78.79,1284.29 220.21,1284.29 1675.29,1284.29 1816.71,1284.29 49.5,1355 249.5,1355 1646,1355 1846,1355 78.79,1425.71 220.21,1425.71 1675.29,1425.71 1816.71,1425.71 149.5,1455 1746,1455
LED: D3.1 U3.2 | length 160.5
  Top Layer w7: D3.1 871.11,474.15 886.68,458.58 U3.2
LiPO: C3.1 J2.1 Q1.3 R1.2 U2.3 | length 1662
  Top Layer w7: J2.1 v1(203.96,1036.66) ; Q1.3 203.96,976.79 v1@203.96,1036.26 ; C3.1 248.41,346.86 U2.3 v1(357.11,346.86) ; v1(309.11,246.26) 389.06,166.31 728.96,166.31 785.1,222.45 R1.2
  Bottom Layer w7: v1(203.96,1036.66) 309.11,931.51 309.11,346.86 ; v1(309.11,246.26) 309.11,346.86 ; v1(357.11,346.86) 309.11,346.86
LiPO_V: C4.1 R1.1 R7.2 U3.11 | length 240.9
  Top Layer w7: C4.1 R7.2 R1.1 839.51,196.86 924.07,281.42 U3.11
NetC1_1: C1.1 D1.1 Q1.2 U1.1 U1.3 | length 963.7
  Top Layer w7: Q1.2 v1(351.11,1002.13) D1.1 ; U1.1 v1(554.78,548.26) 622,548.26 629.59,540.68 U1.3 C1.1
  Bottom Layer w7: v1(351.11,1002.13) 448.23,1002.13 554.78,895.58 v1(554.78,548.26)
NetC9_1: C9.1 X1.3 | length 203.3
  Top Layer w7: X1.3 1293.99,1146.28 1298.84,1141.43 C9.1
NetC9_2: C9.2 X1.2 | length 143.2
  Top Layer w7: C9.2 X1.2
NetC10_1: C10.1 X1.5 | length 203.3
  Top Layer w7: X1.5 1238.87,1146.39 1243.84,1141.43 C10.1
NetC10_2: C10.2 X1.4 | length 143.2
  Top Layer w7: X1.4 1266.43,1176.94 C10.2
NetC11_1: C11.1 U3.5 X2.1 | length 286.2
  Top Layer w7: C11.1 X2.1 729.11,396.15 733.96,391.31 793.96,391.31 802.18,399.53 U3.5
NetC12_1: C12.1 U3.6 X2.3 | length 215.2
  Top Layer w7: C12.1 772.52,356.83 X2.3 802.18,356.93 825.09,379.84 U3.6
NetC15_1: C15.1 U3.3 X3.1 | length 243.5
  Top Layer w7: C15.1 781.43,497.72 X3.1 813.33,496.93 871.37,438.9 U3.3
NetC16_1: C16.1 U3.4 X3.2 | length 332.8
  Top Layer w7: C16.1 721.48,497.03 X3.2 721.59,458.68 728.96,451.31 823.06,451.31 855.15,419.21 U3.4
NetC18_1: C18.1 U3.22 | length 57.4
  Top Layer w7: C18.1 1144.85,187.28 U3.22
NetC19_2: C19.2 X1.27 | length 140
  Top Layer w7: C19.2 X1.27
NetC20_1: C20.1 X1.28 | length 149.3
  Top Layer w7: C20.1 582.57,1204.92 605.01,1227.36 X1.28
NetC22_1: C22.1 R12.2 X1.14 | length 203.4
  Top Layer w7: C22.1 R12.2 991.18,1172.2 991.18,1319.66 X1.14
NetD2_1: D2.1 R5.1 | length 35.8
  Top Layer w7: D2.1 56.44,388.47 R5.1
NetD3_2: D3.2 R10.2 | length 35
  Top Layer w7: R10.2 D3.2
NetF1_2: F1.2 J1.A4 J1.A9 J1.B4 J1.B9 | length 314.4
  Top Layer w7: J1.B4@262.16,595.81 J1.B4 204.51,594.46 189.96,609.01 189.96,762.31 203.96,776.31 262.96,776.31 J1.B9
NetJ1_A5: J1.A5 R2.2 | length 75
  Top Layer w7: J1.A5 R2.2
NetJ1_B5: J1.B5 R3.2 | length 75
  Top Layer w7: J1.B5 R3.2
NetR5_2: R5.2 U2.1 | length 276.3
  Top Layer w7: R5.2 159.31,421.66 193.96,456.31 303.96,456.31 317.03,443.24 U2.1
NetR6_2: R6.2 U2.5 | length 60.2
  Top Layer w7: U2.5 R6.2
NetR11_1: R11.1 U4.2 | length 76.1
  Top Layer w7: U4.2 1521.2,382.43 1597.02,382.43 R11.1
NetR15_1: R15.1 U3.32 | length 72.9
  Top Layer w7: U3.32 1250.74,399.53 1258.96,391.31 R15.1
NetR16_1: R16.1 U3.33 | length 124.2
  Top Layer w7: U3.33 1281.05,419.21 1292.52,407.75 R16.1
NetR17_2: R17.2 X1.26 | length 140.2
  Top Layer w7: X1.26 660.13,1227.36 672.57,1214.92 R17.2
NRST: C17.2 S1.1 U3.7 | length 580.1
  Top Layer w7: C17.2 S1.1 541.11,224.15 568.96,196.31 709.15,196.31 873,360.16 U3.7
PA0: S2.1 U3.10 | length 663.6
  Top Layer w7: S2.1 403.96,262.65 403.96,201.31 423.96,181.31 718.96,181.31 783.92,246.27 861.52,246.27 916.35,301.1 U3.10
PB2: R19.2 U3.20 | length 50
  Top Layer w7: R19.2 U3.20
SCL: H2.1 R8.2 U3.42 U4.4 X1.18 | length 2542
  Top Layer w7: X1.18 880.6,1029.66 1085.8,824.46 1085.8,536.31 ; U3.42 1085.8,536.31 ; R8.2 1363.96,536.31 ; H2.1 1704.21,1104.31 1757.96,1104.31 1781.52,1080.75 1781.52,942.87 1678.96,840.31 1678.96,376.31 1633.99,331.34 U4.4 1488.93,331.34 1476.52,343.75 1476.52,483.75 1423.96,536.31 1363.96,536.31 ; 1085.8,536.31 1363.96,536.31
SDA: H2.2 R9.2 U3.43 U4.3 X1.19 X1.20 | length 2639.4
  Top Layer w7: X1.20 825.48,1224.78 833.96,1216.31 853.04,1216.31 ; X1.19 853.04,1216.31 ; v1(1043.96,561.31) 1066.11,561.31 ; U3.43 1066.11,561.31 ; v1(1113.96,561.31) 1363.96,561.31 ; R9.2 1363.96,561.31 ; H2.2 1747.27,1066.99 1762.96,1051.31 1762.96,947.71 1663.96,848.71 1663.96,386.31 1634.58,356.93 U4.3 1498.33,356.93 1491.52,363.75 1491.52,493.75 1433.96,551.31 1373.96,551.31 1363.96,561.31 ; 853.04,1216.31 853.04,1022.22 1066.11,809.15 1066.11,561.31
  Bottom Layer w7: v1(1043.96,561.31) v1(1113.96,561.31)
SWCLK: H1.3 U3.37 | length 1198.7
  Top Layer w7: U3.37 1184.22,500.51 1187.61,503.9 1189.58,503.9 1201.99,516.31 1326.48,516.31 1358.96,483.83 1358.96,329.42 1391.52,296.86 1624.51,296.86 1693.96,366.31 1693.96,706.31 1717.65,730 H1.3
SWDIO: H1.2 U3.34 | length 1035.4
  Top Layer w7: U3.34 1331.37,438.9 1343.96,426.31 1343.96,319.42 1386.52,276.86 1629.51,276.86 1708.96,356.31 1708.96,611.31 1727.65,630 H1.2
VBUS: C21.1 D1.2 D2.2 F1.1 Q1.1 R4.1 U2.4 | length 1312.5
  Top Layer w7: D2.2 143.6,386.66 160.01,370.26 160.01,328.16 181.86,306.31 361.12,306.31 401.67,346.86 U2.4 476.52,346.86 C21.1 v1(486.52,318.67) ; Q1.1 R4.1 D1.2 v1(351.11,878.6) F1.1
  Bottom Layer w7: v1(351.11,878.6) 444.11,785.61 444.11,361.08 v1(486.52,318.67)
pads on no net: J1. J1.A8 J1.B8 U1.4 U3.12 U3.13 U3.14 U3.15 U3.16 U3.17 U3.18 U3.19 U3.21 U3.25 U3.26 U3.27 U3.28 U3.29 U3.30 U3.31 U3.38 U3.39 U3.40 U3.41 U3.45 U3.46 X1.7

## Polygon pours and split planes (outlines as drawn)
GND on GND_Layer (split plane): 148.43,1484.91 148.5,1484.9 148.51,1484.9 149.01,1484.9 1748,1484.9 1748.56,1484.96 1757.58,1484.6 1767.6,1483.42 1777.5,1481.45 1787.21,1478.71 1796.67,1475.22 1805.84,1470.99 1814.64,1466.06 1823.03,1460.46 1830.95,1454.21 1838.36,1447.36 1845.21,1439.95 1851.46,1432.03 1857.06,1423.64 1861.99,1414.84 1866.22,1405.67 1869.71,1396.21 1872.45,1386.5 1874.42,1376.6 1875.6,1366.58 1875.97,1357.16 1875.86,1356 1875.86,147.5 1875.93,146.77 1875.6,138.42 1874.42,128.4 1872.45,118.5 1869.71,108.79 1866.22,99.32 1861.99,90.16 1857.06,81.36 1851.46,72.97 1845.21,65.05 1838.36,57.64 1830.95,50.79 1823.03,44.54 1814.64,38.94 1805.84,34.01 1796.67,29.78 1787.21,26.29 1777.5,23.55 1767.6,21.58 1757.58,20.4 1747.84,20.01 1747,20.1 148,20.1 147.44,20.04 138.42,20.4 128.4,21.58 118.5,23.55 108.79,26.29 99.33,29.78 90.16,34.01 81.36,38.94 72.97,44.54 65.05,50.79 57.64,57.64 50.79,65.05 44.54,72.97 38.94,81.36 34.01,90.16 29.78,99.33 26.29,108.79 23.55,118.5 21.58,128.4 20.4,138.42 20.01,148.16 20.09,148.93 20.1,149 20.1,149.01 19.6,1357.01 19.54,1357.56 19.9,1366.58 21.08,1376.6 23.05,1386.5 25.79,1396.21 29.28,1405.67 33.51,1414.84 38.44,1423.64 44.04,1432.03 50.29,1439.95 57.14,1447.36 64.55,1454.21 72.47,1460.46 80.86,1466.06 89.66,1470.99 98.82,1475.22 108.29,1478.71 118,1481.45 127.9,1483.42 137.92,1484.6 147.66,1484.99
+3.3V on PWR_Layer (split plane): 148.43,1484.91 148.5,1484.9 148.51,1484.9 149.01,1484.9 1748,1484.9 1748.56,1484.96 1757.58,1484.6 1767.6,1483.42 1777.5,1481.45 1787.21,1478.71 1796.67,1475.22 1805.84,1470.99 1814.64,1466.06 1823.03,1460.46 1830.95,1454.21 1838.36,1447.36 1845.21,1439.95 1851.46,1432.03 1857.06,1423.64 1861.99,1414.84 1866.22,1405.67 1869.71,1396.21 1872.45,1386.5 1874.42,1376.6 1875.6,1366.58 1875.97,1357.16 1875.86,1356 1875.86,147.5 1875.93,146.77 1875.6,138.42 1874.42,128.4 1872.45,118.5 1869.71,108.79 1866.22,99.32 1861.99,90.16 1857.06,81.36 1851.46,72.97 1845.21,65.05 1838.36,57.64 1830.95,50.79 1823.03,44.54 1814.64,38.94 1805.84,34.01 1796.67,29.78 1787.21,26.29 1777.5,23.55 1767.6,21.58 1757.58,20.4 1747.84,20.01 1747,20.1 148,20.1 147.44,20.04 138.42,20.4 128.4,21.58 118.5,23.55 108.79,26.29 99.33,29.78 90.16,34.01 81.36,38.94 72.97,44.54 65.05,50.79 57.64,57.64 50.79,65.05 44.54,72.97 38.94,81.36 34.01,90.16 29.78,99.33 26.29,108.79 23.55,118.5 21.58,128.4 20.4,138.42 20.01,148.16 20.09,148.93 20.1,149 20.1,149.01 19.6,1357.01 19.54,1357.56 19.9,1366.58 21.08,1376.6 23.05,1386.5 25.79,1396.21 29.28,1405.67 33.51,1414.84 38.44,1423.64 44.04,1432.03 50.29,1439.95 57.14,1447.36 64.55,1454.21 72.47,1460.46 80.86,1466.06 89.66,1470.99 98.82,1475.22 108.29,1478.71 118,1481.45 127.9,1483.42 137.92,1484.6 147.66,1484.99

## Keep-outs
Keep-Out Layer:
  lines w10: -0.5,149.5 -0.5,1357 cw(c148,1356.5) 148.5,1505 ; 0,149 ccw(c148.5,148.5) 148,0 1747,0 ccw(c1747.5,148.5) 1896,148 ; 149,1505 1748,1505 cw(c1747.5,1356.5) 1896,1356 ; 1895.96,147.5 1895.96,911.27 ; 1895.96,963.37 1895.96,1131.27 ; 1895.96,1186.27 1895.96,1356

## Other copper
Top Layer:
  rectangle net NetF1_2: 238.96,578.31 278.96,599.31
  rectangle net NetF1_2: 238.96,771.31 278.96,792.46
  rectangle net GND: 238.96,511.31 263.96,566.31
  rectangle net GND: 238.96,806.31 263.96,861.31
  rectangle net NetF1_2: 263.51,771.31 363.96,791.31
  text "1" at 1467,142 h40
Bottom Layer:
  text "4" at 1488,142 h40
GND_Layer (plane layer: these items are gaps in the copper):
  text "2" at 1462,142 h40
PWR_Layer (plane layer: these items are gaps in the copper):
  text "3" at 1462,142 h40

## Silkscreen, mask and mechanical layers (free items; w line width, h text height)
Top Overlay:
  region: 1615.96,1124.31 1615.96,1151.31 1517.96,1151.31 1517.96,1124.31
  region: 1618.96,932.31 1618.96,958.47 1520.96,958.47 1520.96,932.31
  rectangle: 1596.96,932.31 1620.96,1151.31
  rectangle: 1516.96,932.31 1540.96,1151.31
  region: 1620.96,535.31 1620.96,582.57 1518.96,582.57 1518.96,535.31
  region: 1620.96,796.31 1620.96,844.31 1518.96,844.31 1518.96,796.31
  rectangle: 1518.96,582.31 1543.16,797.31
  rectangle: 1592.96,582.31 1620.96,798.31
  text "QWiiC" at 1597.96,958.31 h80 r90
  text "LiPO" at 15.96,920.31 h36
  text "GND" at 1646.96,807.31 h70
  text "SCK" at 1666.99,708.38 h70
  text "DIO" at 1671.96,608.31 h70
  text "ST-LINK" at 1593.96,582.31 h80 r90
  text "3V3" at 1660.96,509.38 h70
  text "CHG" at 19.03,313.66 h36
  text "BME280" at 1381,246 h34
  text "STM32 Dev Board Rev2" at 871.59,23.66 h36
  text "PA0" at 351.59,18.66 h36
  text "RST" at 496.59,18.66 h36
  text "BOOT0" at 616.59,18.66 h36
Mechanical 1:
  lines w10: -0.5,149.5 -0.5,1357 cw(c148,1356.5) 148.5,1505 ; 0,149 ccw(c148.5,148.5) 148,0 1747,0 ccw(c1747.5,148.5) 1896,148 ; 149,1505 1748,1505 cw(c1747.5,1356.5) 1896,1356 ; 1895.96,147.5 1895.96,1356

## Dimensions
-0.5,1357 to 1895.96,1356 on Drill Drawing
149,1505 to 148,0 on Drill Drawing